# EAGLE board K66 (EAGLE 7.7.0)
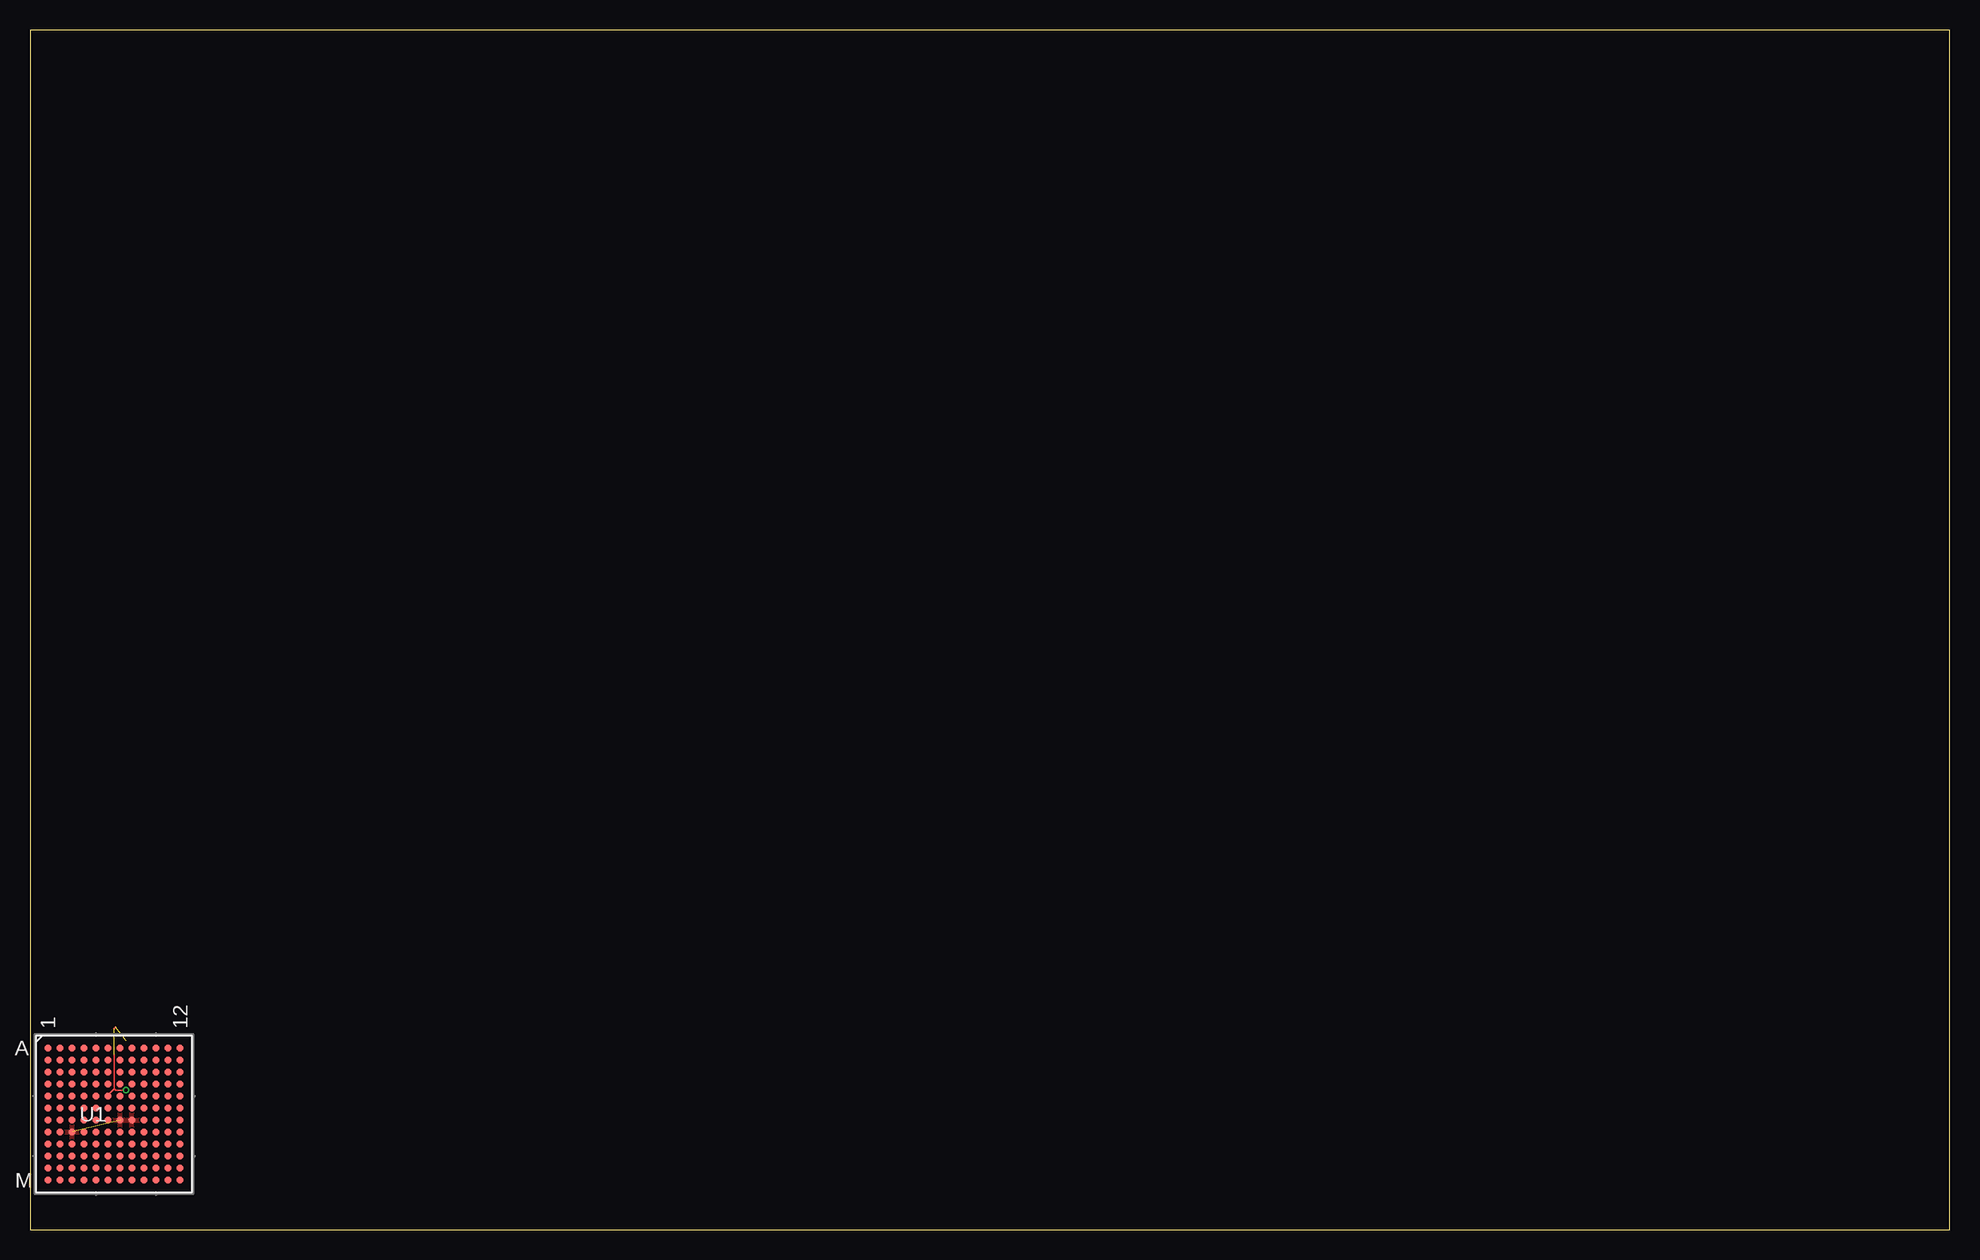
[diagram p0: board, top side]
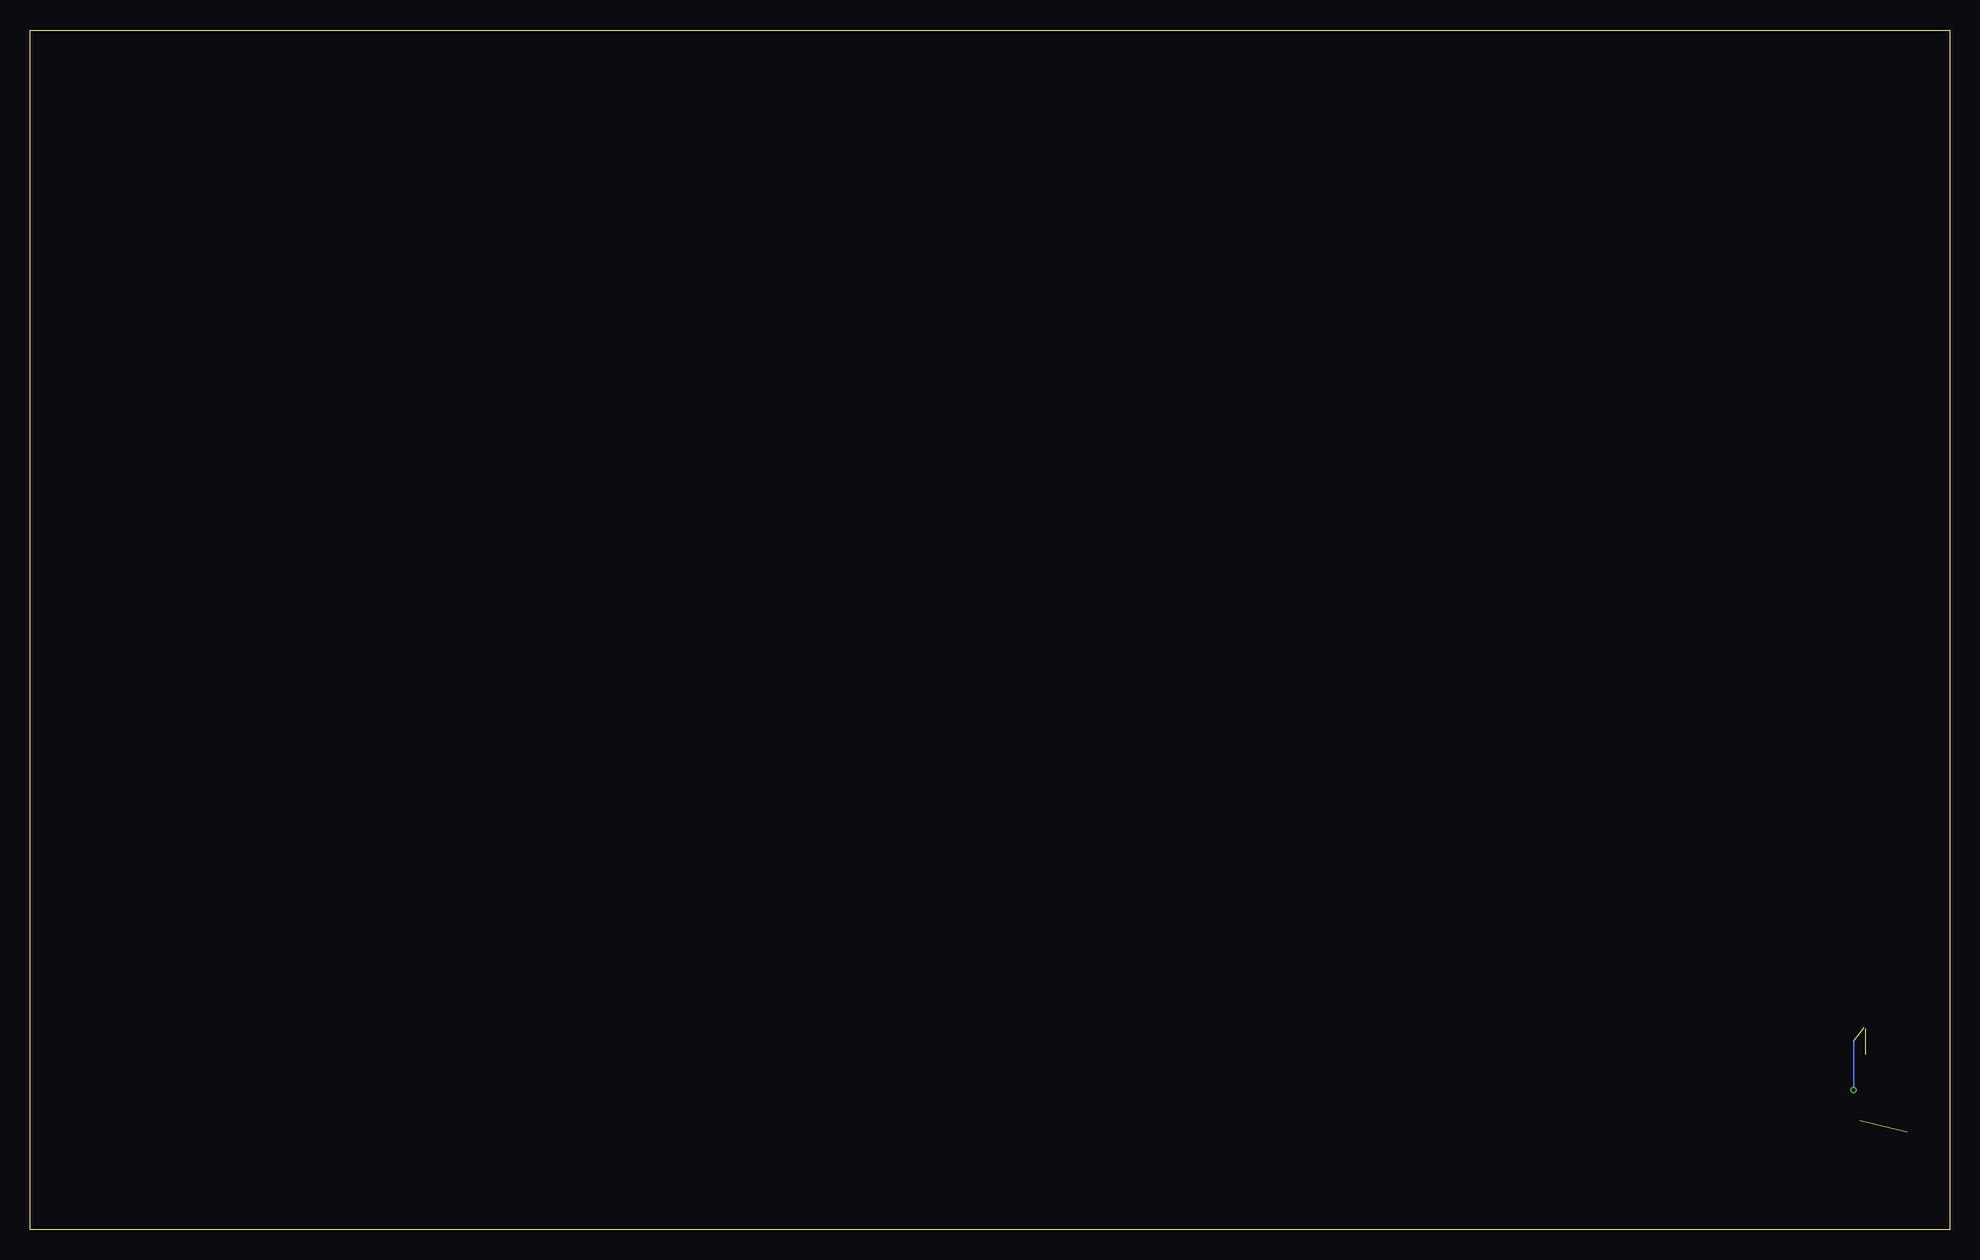
[diagram p1: board, bottom side, seen from below]

Size 160 x 100 mm. Coordinates in mm from the lower left corner, seen from the top.
Outline: 0,0 160,0 160,100 0,100 0,0
Copper layers (1*16): Top 0.035mm / dielectric 1.5mm / Bottom 0.035mm
Design rules "ITEADstudio_DRC *": minimum track width 5mil, minimum drill 10mil, track to track 5mil, track to pad 6mil, pad to pad 6mil, via to via 6mil, smd to smd 0mil, copper to edge 10mil, drill to drill 10mil, minimum pad ring 10mil, minimum via ring 6mil, stop-mask expansion 2mil, vias tented up to drill 100mil, thermal gap 10mil

## Footprints (pad centres in the part's own frame; a part is rotated, then mirrored left to right if it is on the bottom)
98ASA00222D = smd 0.559 x 0.559: A1 -5.5,5.5; A2 -4.5,5.5; A3 -3.5,5.5; A4 -2.5,5.5; A5 -1.5,5.5; A6 -0.5,5.5; A7 0.5,5.5; A8 1.5,5.5; A9 2.5,5.5; A10 3.5,5.5; A11 4.5,5.5; A12 5.5,5.5; B1 -5.5,4.5; B2 -4.5,4.5; B3 -3.5,4.5; B4 -2.5,4.5; B5 -1.5,4.5; B6 -0.5,4.5; B7 0.5,4.5; B8 1.5,4.5; B9 2.5,4.5; B10 3.5,4.5; B11 4.5,4.5; B12 5.5,4.5; C1 -5.5,3.5; C2 -4.5,3.5; C3 -3.5,3.5; C4 -2.5,3.5; C5 -1.5,3.5; C6 -0.5,3.5; C7 0.5,3.5; C8 1.5,3.5; C9 2.5,3.5; C10 3.5,3.5; C11 4.5,3.5; C12 5.5,3.5; D1 -5.5,2.5; D2 -4.5,2.5; D3 -3.5,2.5; D4 -2.5,2.5; D5 -1.5,2.5; D6 -0.5,2.5; D7 0.5,2.5; D8 1.5,2.5; D9 2.5,2.5; D10 3.5,2.5; D11 4.5,2.5; D12 5.5,2.5; E1 -5.5,1.5; E2 -4.5,1.5; E3 -3.5,1.5; E4 -2.5,1.5; E5 -1.5,1.5; E6 -0.5,1.5; E7 0.5,1.5; E8 1.5,1.5; E9 2.5,1.5; E10 3.5,1.5; E11 4.5,1.5; E12 5.5,1.5; F1 -5.5,0.5; F2 -4.5,0.5; F3 -3.5,0.5; F4 -2.5,0.5; F5 -1.5,0.5; F6 -0.5,0.5; F7 0.5,0.5; F8 1.5,0.5; F9 2.5,0.5; F10 3.5,0.5; F11 4.5,0.5; F12 5.5,0.5; G1 -5.5,-0.5; G2 -4.5,-0.5; G3 -3.5,-0.5; G4 -2.5,-0.5; G5 -1.5,-0.5; G6 -0.5,-0.5; G7 0.5,-0.5; G8 1.5,-0.5; G9 2.5,-0.5; G10 3.5,-0.5; G11 4.5,-0.5; G12 5.5,-0.5; H1 -5.5,-1.5; H2 -4.5,-1.5; H3 -3.5,-1.5; H4 -2.5,-1.5; H5 -1.5,-1.5; H6 -0.5,-1.5; H7 0.5,-1.5; H8 1.5,-1.5; H9 2.5,-1.5; H10 3.5,-1.5; H11 4.5,-1.5; H12 5.5,-1.5; J1 -5.5,-2.5; J2 -4.5,-2.5; J3 -3.5,-2.5; J4 -2.5,-2.5; J5 -1.5,-2.5; J6 -0.5,-2.5; J7 0.5,-2.5; J8 1.5,-2.5; J9 2.5,-2.5; J10 3.5,-2.5; J11 4.5,-2.5; J12 5.5,-2.5; K1 -5.5,-3.5; K2 -4.5,-3.5; K3 -3.5,-3.5; K4 -2.5,-3.5; K5 -1.5,-3.5; K6 -0.5,-3.5; K7 0.5,-3.5; K8 1.5,-3.5; K9 2.5,-3.5; K10 3.5,-3.5; K11 4.5,-3.5; K12 5.5,-3.5; L1 -5.5,-4.5; L2 -4.5,-4.5; L3 -3.5,-4.5; L4 -2.5,-4.5; L5 -1.5,-4.5; L6 -0.5,-4.5; L7 0.5,-4.5; L8 1.5,-4.5; L9 2.5,-4.5; L10 3.5,-4.5; L11 4.5,-4.5; L12 5.5,-4.5; M1 -5.5,-5.5; M2 -4.5,-5.5; M3 -3.5,-5.5; M4 -2.5,-5.5; M5 -1.5,-5.5; M6 -0.5,-5.5; M7 0.5,-5.5; M8 1.5,-5.5; M9 2.5,-5.5; M10 3.5,-5.5; M11 4.5,-5.5; M12 5.5,-5.5

## Placement (x,y rotation side)
U1  MK66FN2M0VMD18  [98ASA00222D]  7,9.62 0 top

## Library data of the parts
U1 = K66-BGA; MANUFACTURER_PART_NUMBER: mk66fn2m0vmd18; VENDOR: Freescale

## Nets
E5: U1.E5
E6: U1.E6
E7: U1.E7
E8: U1.E8
F5: U1.F5
F6: U1.F6
F7: U1.F7
F8: U1.F8
G5: U1.G5
G6: U1.G6
GND: U1.G7 U1.G8 U1.H3
H5: U1.H5
H6: U1.H6
H7: U1.H7
H8: U1.H8
K2: U1.K2
L6: U1.L6
M10: U1.M10

## Tracks (layer width: path | path; a pad name or v marks a point on that pad's centre or on a via)
E6  (via drill 0.25)  (2 unrouted)
  Top 0.127: 7,11.75 7,14.62 | 6.5,11.25 7,11.75 | 7,11.75 7.12,11.62 v8,11.62
  Top 0.152: U1.E6 6.5,11.25 | 7,16.75 7.12,16.88
  Bottom 0.127: v8,11.62 8,15.75
GND  (1 unrouted)
  pour Top: 0,34.29 41.91,34.29 41.91,-10.16 0,-10.16